# Altium PCB pll_layout.PcbDoc
Units mm, origin at the board's own origin, x right, y up, seen from the top; angles counter-clockwise.
Board outline 90.18 x 57.51 mm, 4 copper layers (Top Layer, GND_L2, PWR_L3, Bottom Layer), stack 1.571 mm thick; 57 components, 26 nets, 160 pads, 293 vias.
Unrouted connection lines stored in the file: 1.
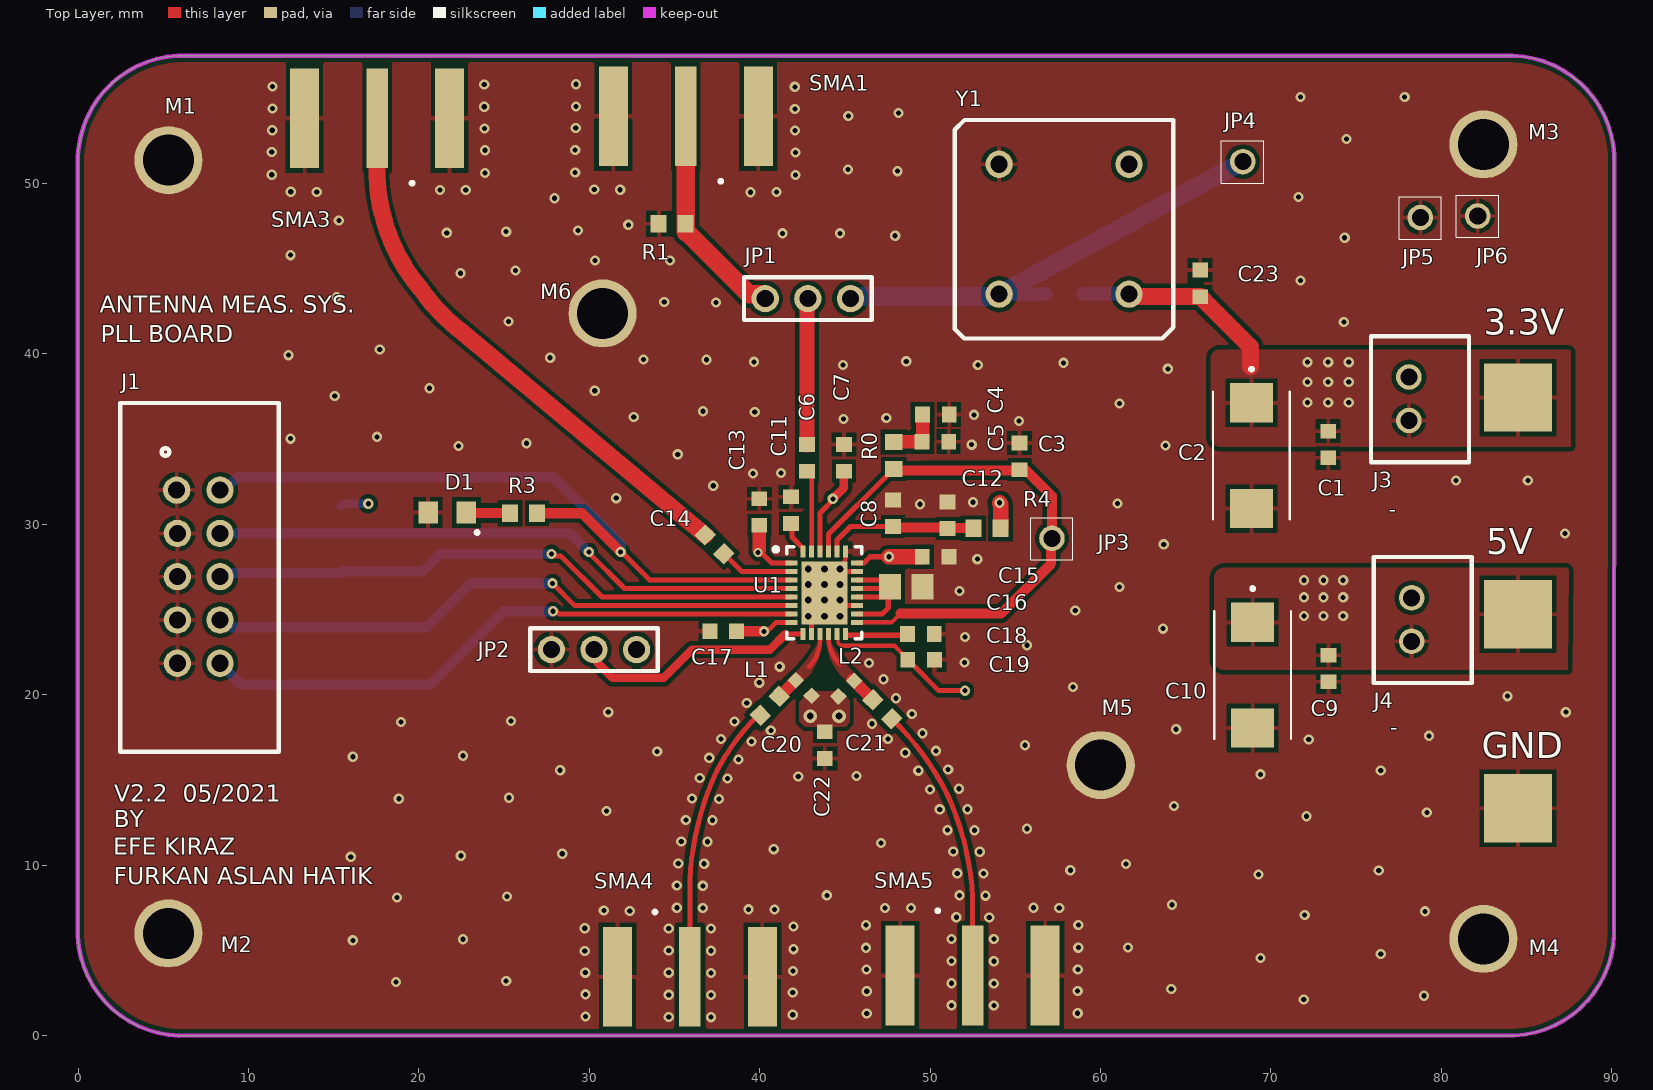
[diagram p0: Top Layer view]
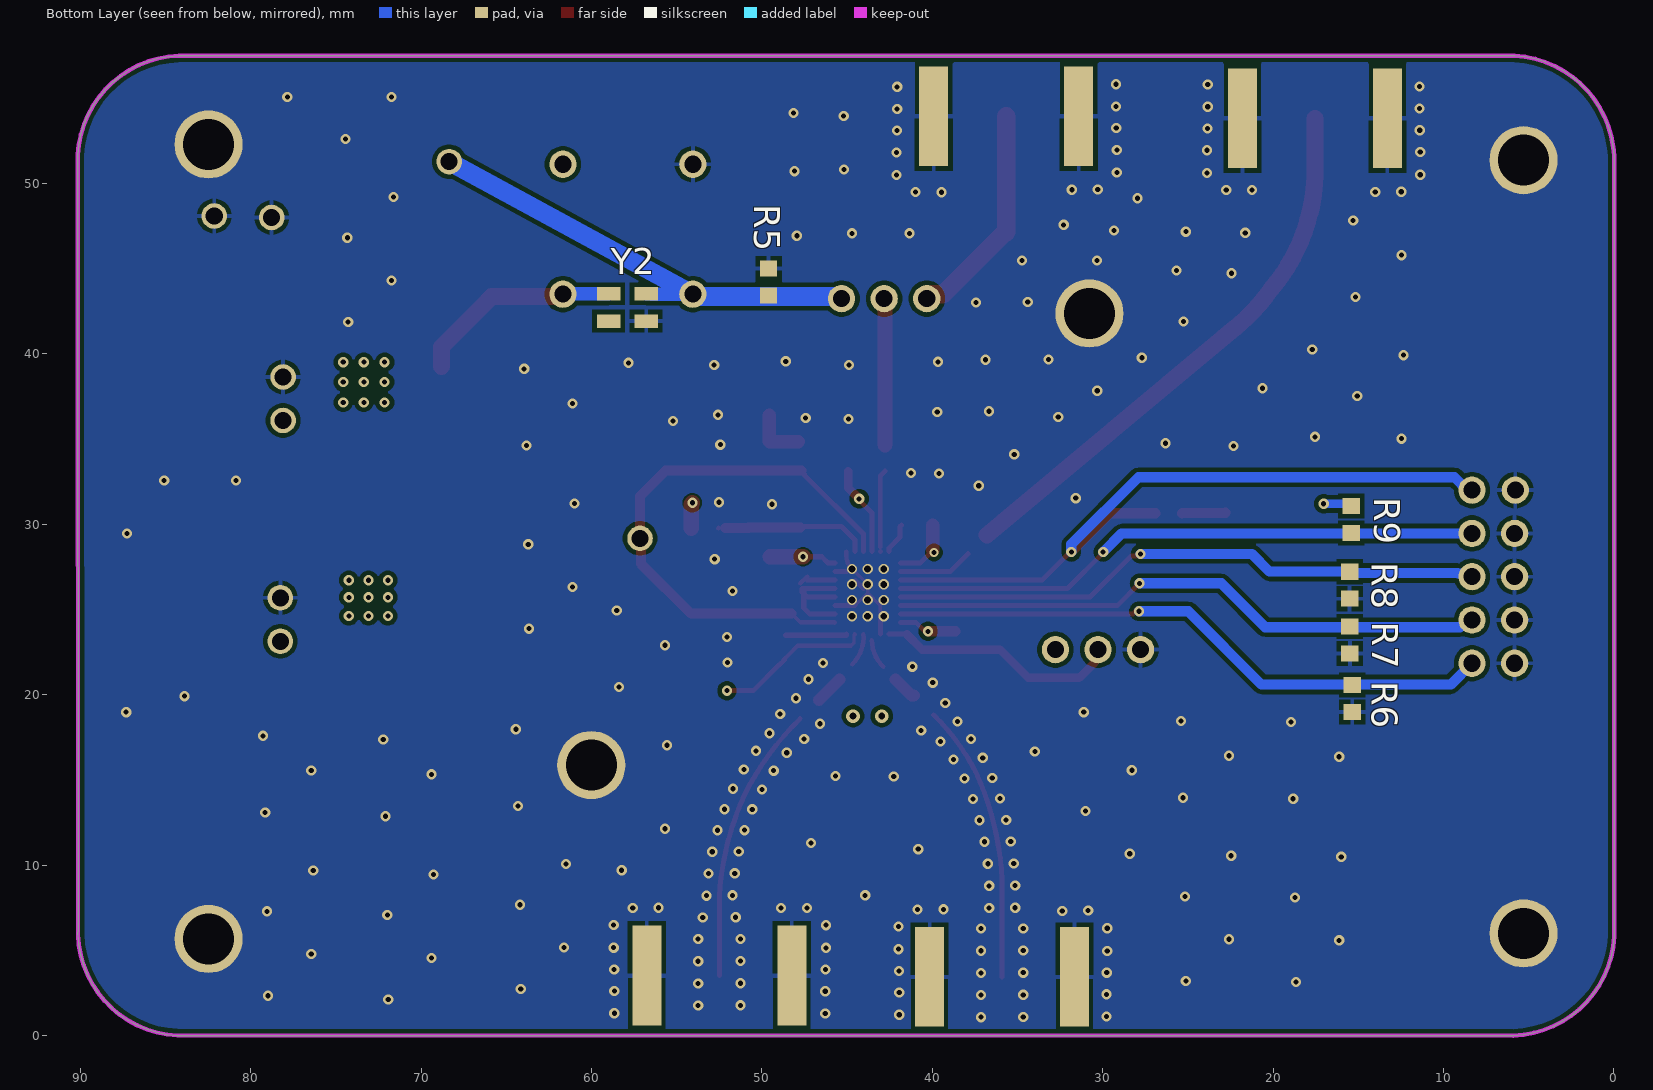
[diagram p1: Bottom Layer view, seen from below]
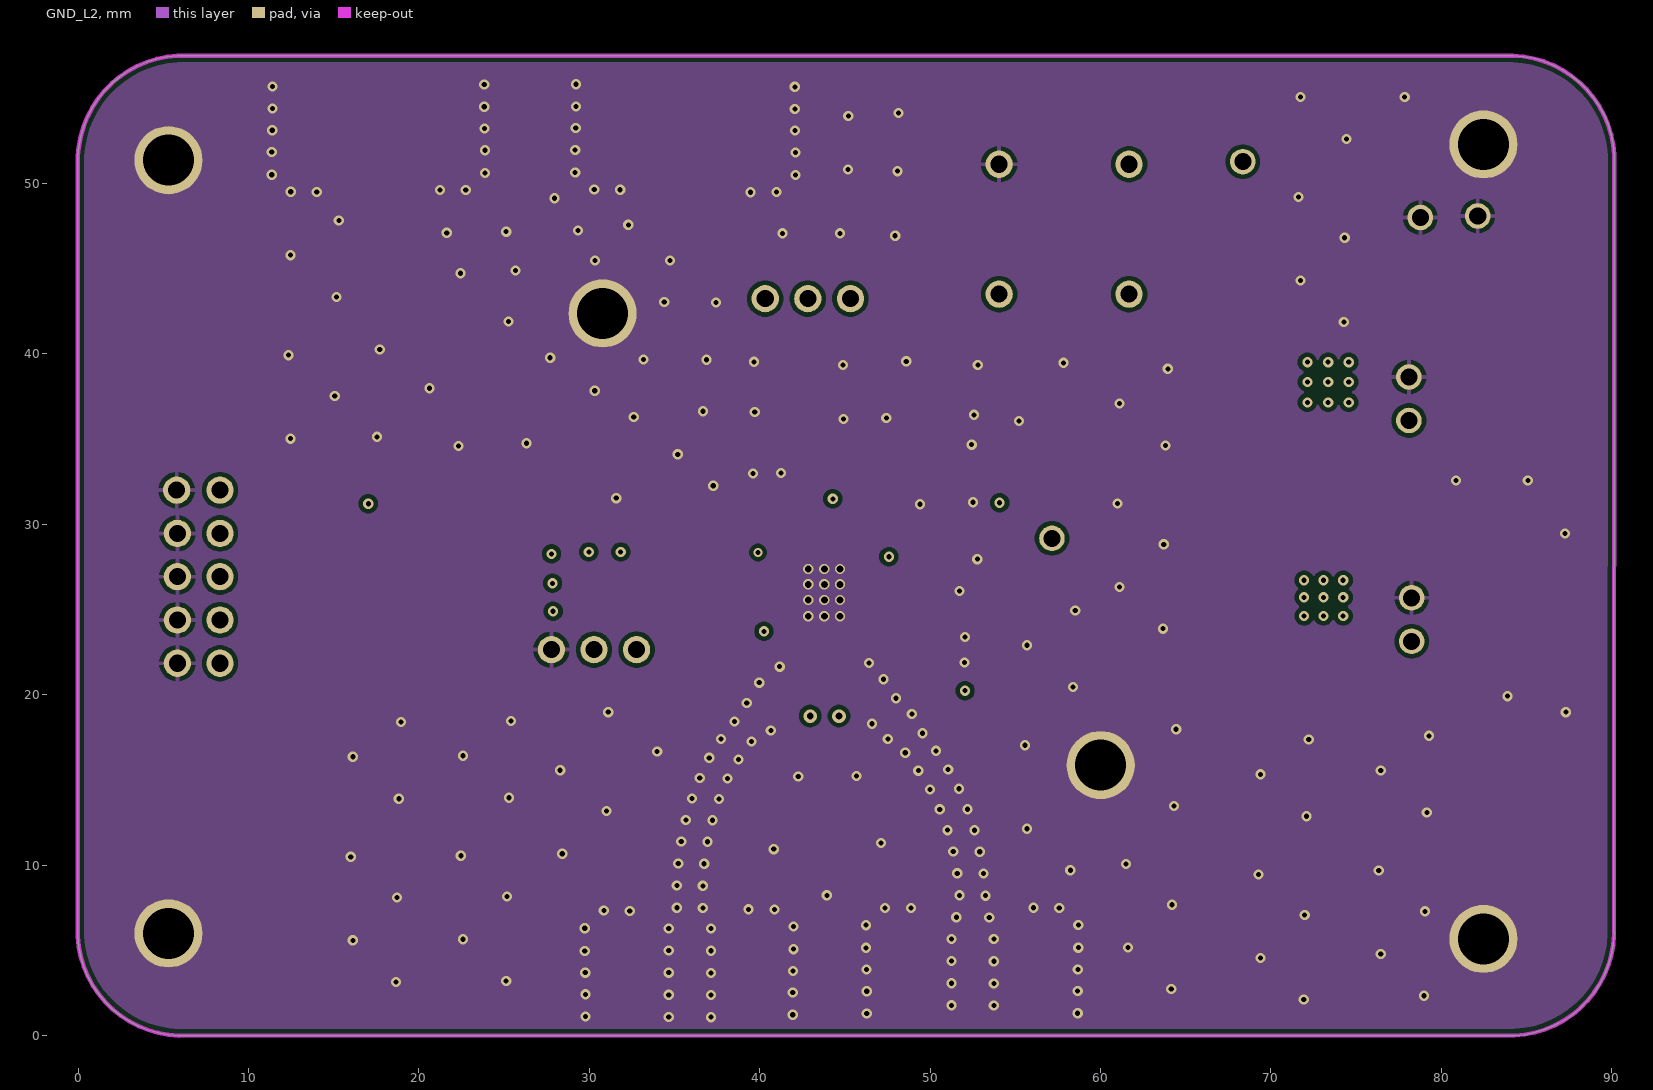
[diagram p2: GND_L2]
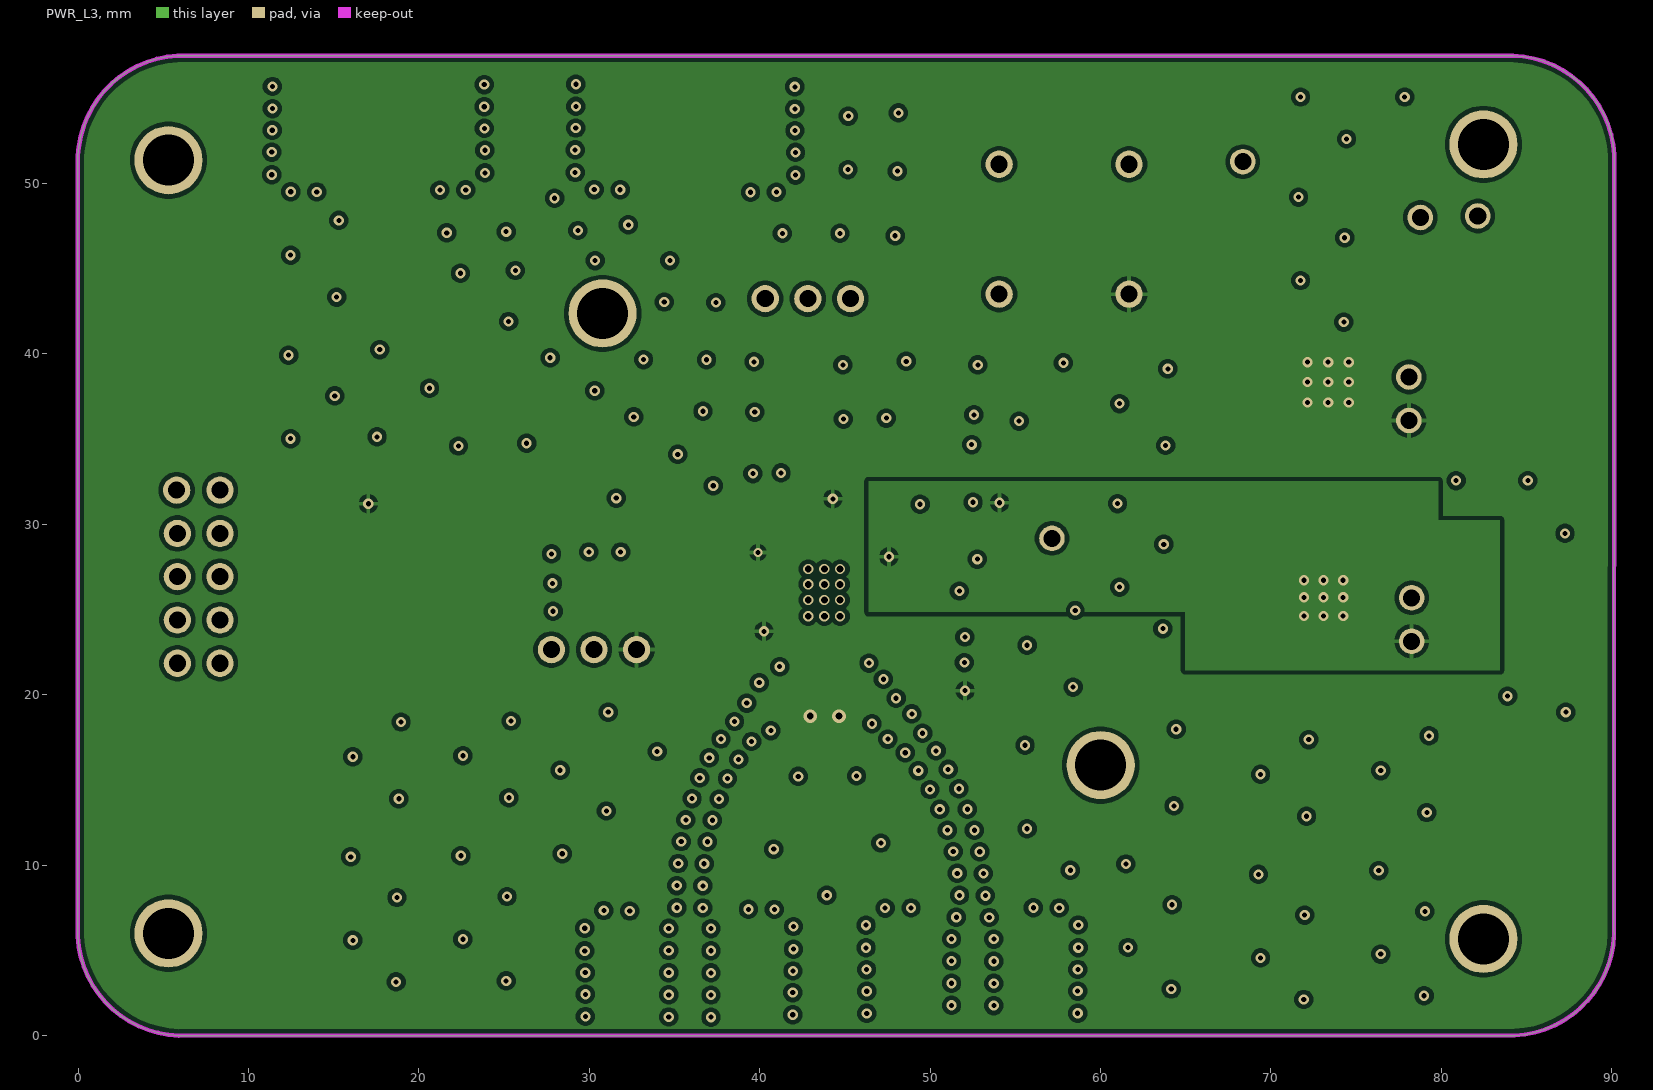
[diagram p3: PWR_L3]
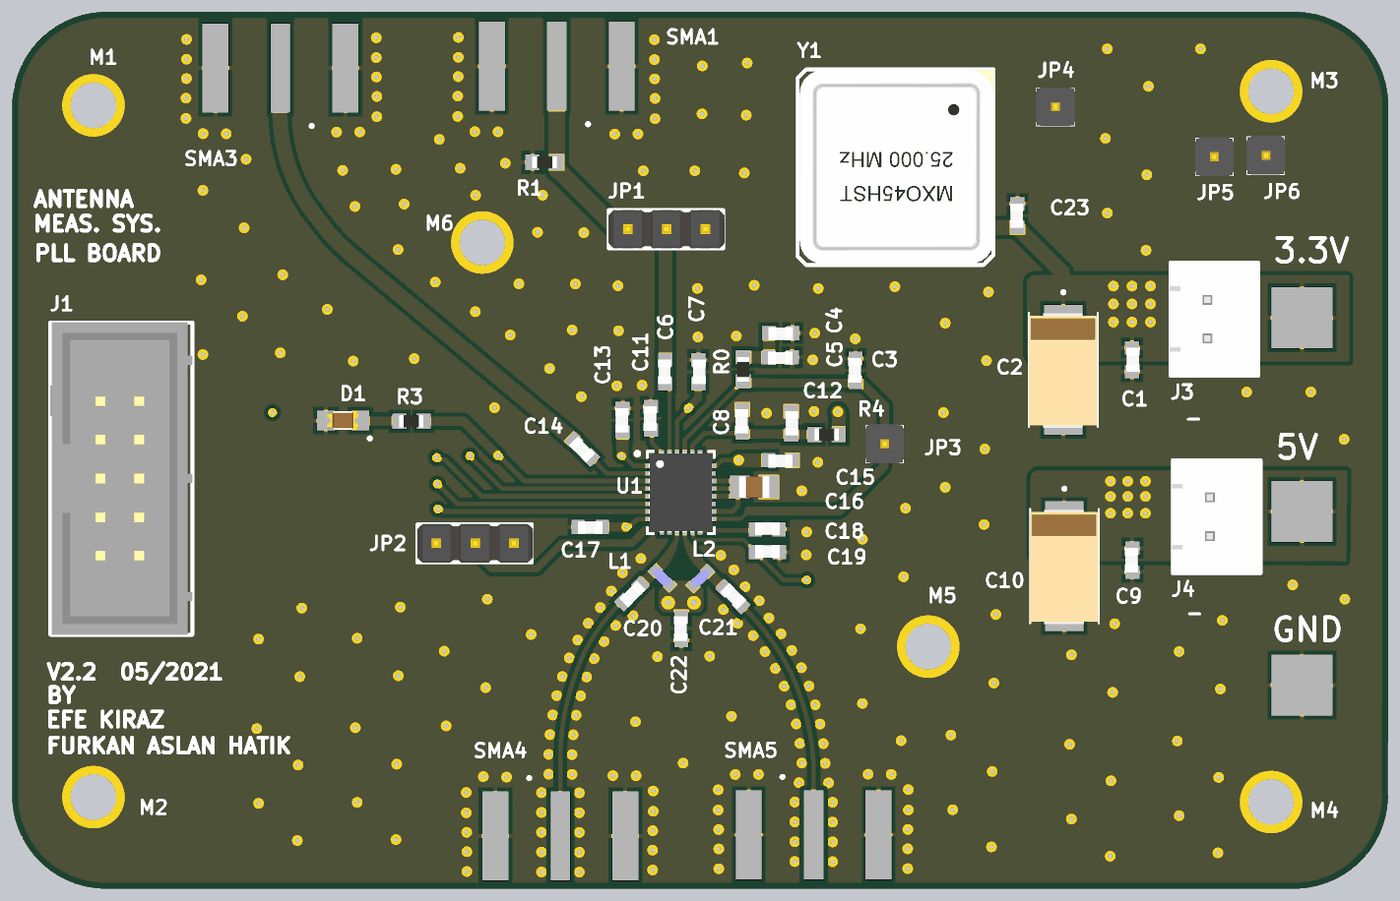
[diagram p4: 3D render of the assembled board from above, using the file's embedded part models]
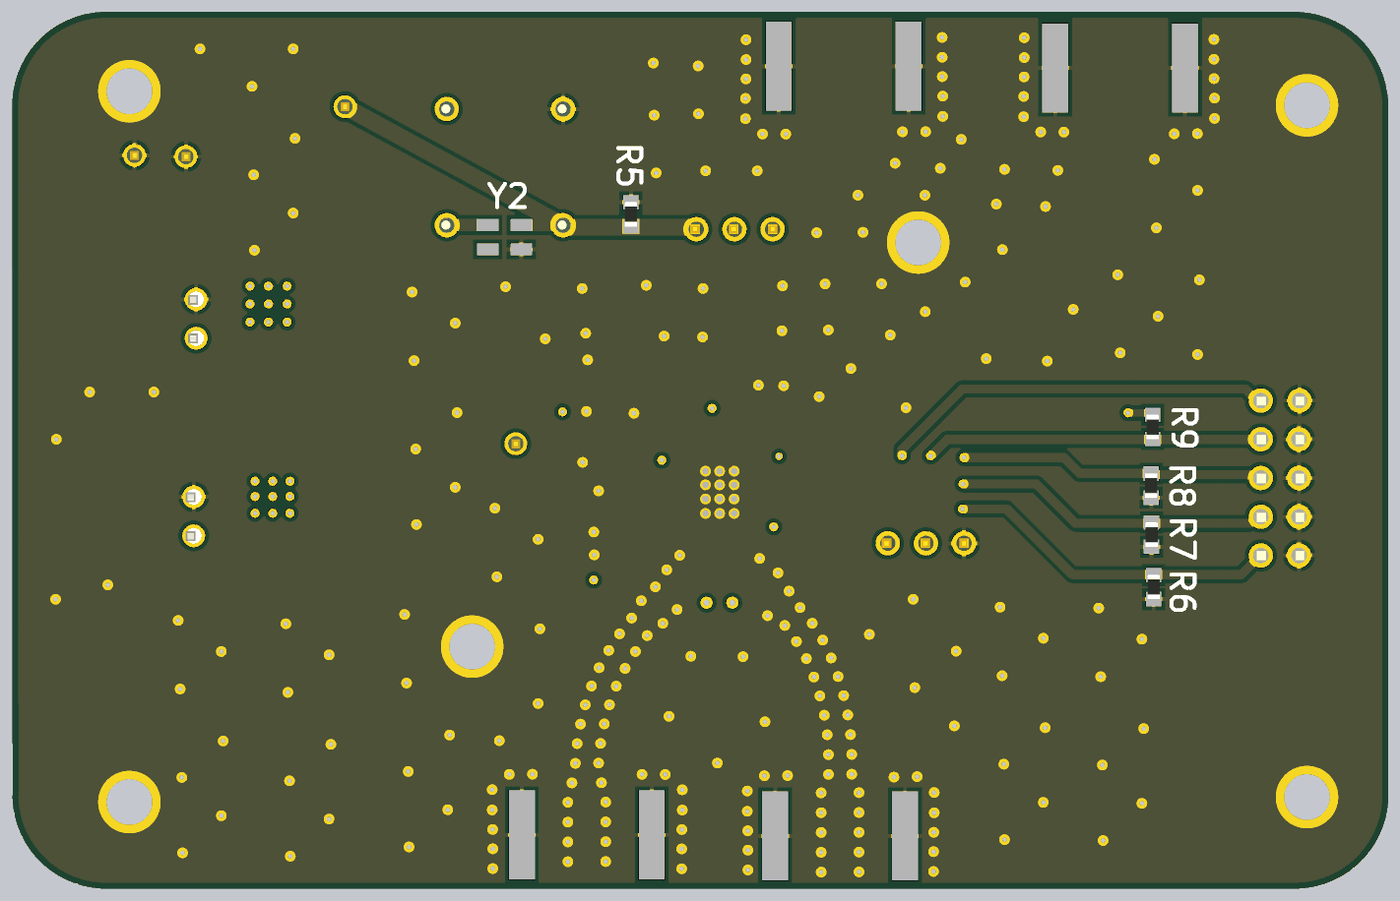
[diagram p5: 3D render of the assembled board from below, using the file's embedded part models]

## Layer stack, top to bottom
Top Solder: solder mask 0.0102, Solder Resist, Dk 3.5
Top Layer: signal copper 0.0356
Dielectric 2: prepreg 0.2, PP-021, Dk 4.7
GND_L2: signal copper 0.0175
Dielectric 1: dielectric 1.065, FR-4, Dk 4.8
PWR_L3: signal copper 0.0175
Dielectric 3: prepreg 0.2, PP-021, Dk 4.7
Bottom Layer: signal copper 0.0356
Bottom Solder: solder mask 0.0102, Solder Resist, Dk 3.5

## Board outline
1.201,2.439 0.86,2.943 0.57,3.477 0.334,4.038 0.155,4.619 0.035,5.215 -0.026,5.821 -0.026,51.586 0.005,51.957 0.156,52.777 0.324,53.361 0.55,53.926 0.831,54.465 1.163,54.975 1.545,55.449 1.971,55.882 2.438,56.272 2.941,56.613 3.476,56.903 4.037,57.139 4.618,57.318 5.214,57.438 5.819,57.499 6.123,57.5 83.917,57.501 84.221,57.506 84.828,57.455 85.426,57.345 86.01,57.176 86.575,56.95 87.115,56.669 87.624,56.337 88.098,55.955 88.532,55.529 88.921,55.061 89.263,54.558 89.552,54.023 89.788,53.462 89.967,52.88 90.087,52.284 90.148,51.679 90.149,51.375 90.153,48.8 90.131,6.231 90.136,5.927 90.085,5.321 89.975,4.723 89.806,4.139 89.581,3.574 89.3,3.034 88.968,2.525 88.586,2.051 88.16,1.617 87.693,1.228 87.189,0.886 86.655,0.597 86.094,0.361 85.513,0.182 84.917,0.061 84.311,0 84.007,0 7.248,0 6.205,0.001 5.901,-0.004 5.295,0.047 4.696,0.157 4.112,0.326 3.547,0.551 3.008,0.832 2.498,1.165 2.025,1.546 1.591,1.972

## Design rules (kind name [scope] priority, off if disabled: settings)
Clearance NETC20_2 [InNamedPolygon('NETC20_2_L01_P002')] p1: gap=0.293 ignorepadtopadclearanceinfootprint=FALSE except(0: SMDPad-Hole THPad-Hole Via-Hole Fill-Hole Poly-Hole Region-Hole Text-Hole; 0.1: SMDPad-Fill SMDPad-Poly SMDPad-Region THPad-Fill THPad-Poly THPad-Region Via-Fill Via-Poly Via-Region Fill-Fill Fill-Poly Fill-Region Poly-Poly Poly-Region Region-Region; 0.254: SMDPad-SMDPad SMDPad-THPad SMDPad-Via SMDPad-Text THPad-THPad THPad-Via THPad-Text Via-Text Fill-Text Poly-Text Region-Text Text-Text; 0.3: Via-Via)
Clearance NETC20_1 [InNet('NetC20_1') vs InNet('NetC20_1')] p2: gap=0.293 ignorepadtopadclearanceinfootprint=FALSE except(0: Arc-Hole Track-Hole SMDPad-Hole THPad-Hole Via-Hole Fill-Hole Poly-Hole Region-Hole Text-Hole; 0.1: SMDPad-Fill SMDPad-Poly SMDPad-Region THPad-Fill THPad-Poly THPad-Region Via-Fill Via-Poly Via-Region Fill-Fill Fill-Poly Fill-Region Poly-Poly Poly-Region Region-Region; 0.254: SMDPad-SMDPad SMDPad-THPad SMDPad-Via SMDPad-Text THPad-THPad THPad-Via THPad-Text Via-Text Fill-Text Poly-Text Region-Text Text-Text; 0.3: Via-Via)
Clearance Clearance_6 [InNamedPolygon('NETC21_2_L01_P002')] p3: gap=0.254 ignorepadtopadclearanceinfootprint=FALSE except(0: Arc-Hole Track-Hole SMDPad-Hole THPad-Hole Via-Hole Fill-Hole Poly-Hole Region-Hole Text-Hole; 0.1: Arc-Fill Arc-Poly Arc-Region Track-Fill Track-Poly Track-Region SMDPad-Fill SMDPad-Poly SMDPad-Region THPad-Fill THPad-Poly THPad-Region Via-Fill Via-Poly Via-Region Fill-Fill Fill-Poly Fill-Region Poly-Poly Poly-Region Region-Region; 0.3: Via-Via)
Clearance NETC21_1 [InNet('NetC21_1') vs InNet('NetC21_1')] p4: gap=0.293 ignorepadtopadclearanceinfootprint=FALSE except(0: SMDPad-Hole THPad-Hole Via-Hole Fill-Hole Poly-Hole Region-Hole Text-Hole; 0.1: SMDPad-Fill SMDPad-Poly SMDPad-Region THPad-Fill THPad-Poly THPad-Region Via-Fill Via-Poly Via-Region Fill-Fill Fill-Poly Fill-Region Poly-Poly Poly-Region Region-Region; 0.254: SMDPad-SMDPad SMDPad-THPad SMDPad-Via SMDPad-Text THPad-THPad THPad-Via THPad-Text Via-Text Fill-Text Poly-Text Region-Text Text-Text; 0.3: Via-Via)
Clearance STD_Clearance [All] p5: gap=0.254 ignorepadtopadclearanceinfootprint=FALSE except(0.15: Arc-Text Track-Text SMDPad-Text THPad-Text Via-Text Fill-Text Poly-Text Region-Text Text-Text; 0.2: Arc-Arc Arc-Track Arc-SMDPad Arc-THPad Track-Track Track-SMDPad Track-THPad SMDPad-SMDPad SMDPad-THPad SMDPad-Via SMDPad-Hole THPad-THPad THPad-Via THPad-Hole Via-Hole Fill-Hole Poly-Hole Region-Hole Text-Hole; 0.3: Arc-Hole Track-Hole Via-Via)
HoleSize [All] p1: absolutevalues=TRUE maxlimit=6 minlimit=0.2 maxpercent=80.000 minpercent=20.000
HoleToHoleClearance [All] p1: gap=0.5 allowstackedmicrovias=TRUE
MinimumSolderMaskSliver [All] p1 off: minsoldermaskwidth=0.254
PlaneClearance [All] p1: clearance=0.6
PolygonConnect [All] p1: connectstyle=Relief reliefconductorwidth=0.254 reliefentries=4 polygonreliefangle="90 Angle" airgapwidth=0.254
RoomDefinition pll_schematic [InComponentClass('pll_schematic')] p1: confinementstyle=ConfineIn formatcopy=TRUE lockcomponents=FALSE outline -0.392,-2.59 91.288,-2.59 91.288,58.68 -0.392,58.68
RoutingVias [All] p1: holewidth=0.6 width=0.6 viastyle="Through Hole" minholewidth=0.2 minwidth=0.4 maxholewidth=1 maxwidth=1.6
SolderMaskExpansion [All] p1: expansion=0.05 istentingtop=FALSE
Width [All] p1: maxlimit=2 minlimit=0.2 preferedwidth=0.254 midlayer1_minwidth=0.254 midlayer1_maxwidth=0.254 midlayer2_minwidth=0.254 midlayer2_maxwidth=0.254 minimp=50.000000 maximp=50.000000 favimp=50.000000
26 further rules are at their usual default settings.

## Components (designator, comment, footprint, x,y, rotation, side; value= is the part's Value field where it differs from the comment)
C1 "1uF" C0603 73.365,34.69 r90 top
C2 "330uF" C_TANT_D 68.86,34.03 r270 top
C3 "2.7nF" C0603 55.24,33.99 r270 top
C4 "22nF" C0603 50.34,36.44 r0 top
C5 "6.8nF" C0603 50.31,34.85 r0 top
C6 "1uF" C0603 42.773,33.9 r270 top
C7 "10nF" C0603 44.94,33.9 r90 top
C8 "1uF" C0603 47.82,30.65 r270 top
C9 "1uF" C0603 73.38,21.54 r270 top
C10 "330uF" C_TANT_D 68.93,21.15 r270 top
C11 "1uF" C0603 41.83,30.84 r270 top
C12 "10nF" C0603 51.02,30.53 r90 top
C13 "100nF" C0603 39.973,30.725 r270 top
C14 "22nF" C0603 37.347,28.826 r315 top
C15 "10nF" C0603 50.32,28.1 r0 top
C16 "2.2uF" C0805 48.6,26.34 r0 top
C17 "100nF" C0603 37.853,23.725 r0 top
C18 "1uF" C0603 49.46,23.56 r180 top
C19 "10nF" C0603 49.47,22.06 r180 top
C20 "100pF" C0603 40.59,19.35 r45 top
C21 "100pF" C0603 47.198,19.15 r135 top
C22 "100nF" C0603 43.82,17.05 r270 top
C23 "100nF" C0603 65.85,44.14 r270 top
D1 "-" D0805 21.66,30.7 r180 top
J1 "-" IDC-2X05 8.323,21.85 r180 top
J3 "-" JST_XH_A_2 78.1,37.725 r180 top
J4 "-" JST_XH_A_2 78.26,24.765 r180 top
JP1 "-" PIN_HEADER_1X03 42.823,43.25 r270 top
JP2 "-" PIN_HEADER_1X03 30.273,22.65 r270 top
JP3 "-" PIN_HEADER_1X01 57.15,29.18 r0 top
JP4 "-" PIN_HEADER_1X01 68.35,51.29 r0 top
JP5 "-" PIN_HEADER_1X01 78.77,48.01 r0 top
JP6 "-" PIN_HEADER_1X01 82.14,48.1 r0 top
L1 "68nH" L0402 42.58,20.4 r135 top
L2 "68nH" L0402 45.08,20.36 r225 top
M1 "MOUNTING_HOLE" MOUNTING_HOLE_NP_M3 5.298,51.375 r0 top
M2 "MOUNTING_HOLE" MOUNTING_HOLE_NP_M3 5.298,6 r0 top
M3 "MOUNTING_HOLE" MOUNTING_HOLE_NP_M3 82.473,52.3 r0 top
M4 "MOUNTING_HOLE" MOUNTING_HOLE_NP_M3 82.473,5.675 r0 top
M5 "MOUNTING_HOLE" MOUNTING_HOLE_NP_M3 60.01,15.87 r0 top
M6 "MOUNTING_HOLE" MOUNTING_HOLE_NP_M3 30.78,42.38 r0 top
R0 "453R" R0603 47.873,34.05 r270 top
R1 "51.1R" R0603 34.86,47.64 r0 top
R3 "330R" R0603 26.13,30.65 r0 top
R4 "15R" R0603 53.35,29.78 r0 top
R5 "51.1R" R0603 49.61,44.23 r270 bottom
R6 "200K" R0603 15.35,19.78 r90 bottom
R7 "200K" R0603 15.49,23.21 r90 bottom
R8 "200K" R0603 15.51,26.43 r90 bottom
R9 "200K" R0603 15.42,30.28 r90 bottom
SMA1 "-" SMA 35.66,53.943 r180 top
SMA3 "-" SMA 17.548,53.825 r180 top
SMA4 "-" SMA 35.898,3.45 r0 top
SMA5 "-" SMA 52.498,3.525 r0 top
U1 "LTC6946" QFN50P400X500X80_HS-29N_2 43.793,25.981 r0 top
Y1 "-" XOSC 57.85,47.31 r180 top
Y2 "OPT" XOSC_SMD 58.99,41.93 r0 bottom

## Footprints (in the part's own frame and the unit in brackets; to place one, negate y for a bottom-side part, rotate by r counter-clockwise, add the part's x,y. Pads: shape width x height; smd on the part's side, far side on the other; paste and mask are expansions set on the pad)
C0603 [mm]
  rect 0.87x0.93 smd: 1(-0.78,0) 2(0.78,0)
  body extent -0.8,-0.48 0.8,0.38, height 0.83
C0805 [mm]
  rect 1.3x1.5 smd: 1(-0.95,0) 2(0.95,0)
  body extent -1,-0.72 1,0.73, height 1.22
C_TANT_D [mm]
  rect 2.31x2.52 smd: 1(-3.1,0) 2(3.1,0)
  silkscreen extent -5.18,-2.25 3.75,2.25, body extent -3.7,-2.27 3.8,2.22, height 3.15
D0805 [mm]
  rect 1.15x1.3 smd: A(-1.125,0) C(1.125,0)
  silkscreen extent -1.85,1.08 -1.65,1.27, body extent -0.97,-0.62 1.03,0.63, height 1.1
IDC-2X05 [mm]
  round 1.6 hole 1: 1(2.54,-10.16) 2(0,-10.16) 3(2.5,-7.62) 4(0,-7.62) 5(2.5,-5.08) 6(0,-5.08) 7(2.5,-2.54) 8(0,-2.54) 9(2.5,0) 10(0,0)
  silkscreen extent -3.45,-15.28 5.85,5.2, body extent -3.45,-15.3 5.85,5.2, height 9.1
JST_XH_A_2 [mm]
  round 1.5 hole 1: 1(0,1.625) 2(0,-0.925)
  silkscreen extent -3.53,-3.32 2.22,4.08, body extent -3.55,-3.23 2.29,3.98, height 7.21
L0402 [mm]
  rect 0.7x0.7 smd: 1(-0.65,0) 2(0.65,0)
  body extent -0.59,-0.3 0.59,0.34, height 0.65
MOUNTING_HOLE_NP_M3 [mm]
  round 4 hole 3: 1(0,0)
PIN_HEADER_1X01 [mm]
  round 1.5 hole 1: 1(0,0)
  silkscreen extent -1.25,-1.26 1.22,1.21, body extent -1.28,-1.28 1.26,1.26, height 5.94
PIN_HEADER_1X03 [mm]
  round 1.6 hole 1: 1(0,2.5) 2(0,0) 3(0,-2.5)
  silkscreen extent -1.25,-3.75 1.25,3.75, body extent -1.27,-3.77 1.27,3.85, height 9.5
QFN50P400X500X80_HS-29N_2 [mm] "QFN, 28-Leads, Body 4.00x5.00mm, Pitch 0.50mm, Thermal Pad 2.70x3.70mm, IPC Medium Density"
  rect 0.7x0.3 smd: 1(-1.925,1.75) 2(-1.925,1.25) 3(-1.925,0.75) 4(-1.925,0.25) 5(-1.925,-0.25) 6(-1.925,-0.75) 7(-1.925,-1.25) 8(-1.925,-1.75) 15(1.925,-1.75) 16(1.925,-1.25) 17(1.925,-0.75) 18(1.925,-0.25) 19(1.925,0.25) 20(1.925,0.75) 21(1.925,1.25) 22(1.925,1.75)
  rect 0.3x0.7 smd: 9(-1.25,-2.425) 10(-0.75,-2.425) 11(-0.25,-2.425) 12(0.25,-2.425) 13(0.75,-2.425) 14(1.25,-2.425) 23(1.25,2.425) 24(0.75,2.425) 25(0.25,2.425) 26(-0.25,2.425) 27(-0.75,2.425) 28(-1.25,2.425)
  rect 2.7x3.7 smd: 29(0,0)
  silkscreen extent -2.97,-2.7 2.2,2.7, body extent -2.1,-2.6 2.1,2.6, height 0.8
R0603 [mm]
  rect 0.94x1.02 smd: 1(-0.79,0) 2(0.79,0)
  body extent -0.8,-0.4 0.8,0.4, height 0.45
SMA [mil]
  rect 50x230 smd: 1(0,0)
  rect 67x230 smd: 2(-167.5,0) 2(167.5,0)
  rect 67x230 smd far side: 2(-167.5,0) 2(167.5,0)
  silkscreen extent -85,146 -77,154, body extent -188,-496 188,64, height 176
XOSC [mm]
  round 1.6 hole 1: 1(-3.825,-3.825) 4(3.8,-3.825) 5(3.8,3.8) 8(-3.825,3.8)
  silkscreen extent -6.43,-6.43 6.4,6.4, body extent -6.42,-6.37 6.28,6.33, height 4.6
XOSC_SMD [mm]
  rect 1.4x0.8 smd: 1(0,0) 2(-2.2,0) 3(-2.2,-1.6) 4(0,-1.6)

## Part data
C1 C3 C4 C5 C6 C7 C8 C9 C11 C12 C13 C14 C15 C16 C17 C18 C19 C20 C21 C22 C23: library part C
C2 C10: library part CP
D1: library part LED, ASSEMBLY=OPT
J1: library part Conn_Gene_1x10
J3 J4: library part Conn_Gene_1x02
JP1 JP2: library part "Pin Header 1x03"
JP3 JP4 JP5 JP6: library part "Pin Header 1x01"
L1 L2: library part L
M1 M2 M3 M4 M5 M6: "Non-Plated"
R0 R1 R3 R4 R5: library part R
  R3: ASSEMBLY=OPT
R6 R7 R8 R9: library part R, "OPT", ASSEMBLY=OPT
SMA1 SMA3 SMA4 SMA5: library part SMA
U1: library part LTC6946IUFD-1#PBF-ND, ComponentLink1Description=LTC6946, ComponentLink1URL=https://www.digikey.com/en/products/detail/analog-devices-inc/LTC6946IUFD-1-PBF/2756832
Y1: library part OSC
Y2: library part OSC_SMD

## Free pads (board coordinates)
  rect 4x4 smd: 6(84.5,24.73) 7(84.5,13.34) 8(84.5,37.44)

## Via types
v1: diameter 0.6, hole 0.3, Top Layer to Bottom Layer, 278 vias
v2: diameter 0.6, hole 0.4, Top Layer to Bottom Layer, 12 vias
v3: diameter 0.8, hole 0.4, Top Layer to Bottom Layer, 2 vias
v4: diameter 0.5, hole 0.3, Top Layer to Bottom Layer, 1 vias

## Nets (pads, with @x,y where several pads share a name; then routed paths per layer and width w, separated by ;. In a path a pad name is that pad's centre, name@x,y a point inside that pad or via, vN(x,y) a via of type N, cw(c..) or ccw(c..) an arc to the next point about the centre after c; other vN are vias at no path point)
3.3V: C1.2 C2.1 C7.1 C13.2 C17.2 C19.2 C22.1 C23.2 J3.1 JP2.1 L1.1 L2.2 pad.8 R9.2 U1.1 U1.8 U1.13 U1.26 Y1.8 Y2.4 | length 35.3
  Top Layer w0.2: U1.13@44.566,23.533 44.593,23.506 44.593,23.057 44.77,22.88
  Top Layer w0.25: 44.77,22.88 47.9,22.88 48.38,22.4 48.69,22.09 C19.2
  Top Layer w0.254: U1.13 U1.13@44.566,23.533
  Top Layer w0.3: v4@40.088,28.35 40.365,28.073 40.706,27.731 U1.1 ; v1(40.248,23.725) 40.438,23.725 40.944,24.231 U1.8 ; U1.26 43.543,30.669 v1@44.373,31.5 ; C19.2 48.69,22.03 48.975,21.745 49.005,21.745 50.51,20.24 v1(52.05,20.24)
  Top Layer w0.5: v1(44.29,31.5) 44.94,32.15 C7.1
  Top Layer w0.6: C17.2 v1(40.248,23.725)
  Top Layer w0.8: v4@39.973,28.479 C13.2
  Top Layer w1: Y1.8@61.705,43.37 61.71,43.365 65.875,43.365 66.065,43.175 66.065,43.145 68.8,40.41 68.8,39.28
  Bottom Layer w0.5: R9.2 15.55,31.2 17.02,31.2 v1(17.03,31.21)
  Bottom Layer w0.8: Y2.4 61.655,43.53 Y1.8
  other v1: 72.14,37.16 73.36,37.16 74.57,37.16 72.14,38.35 73.36,38.35 74.57,38.35 72.14,39.52 73.36,39.52 74.57,39.52
  other v3: 42.96,18.75 44.65,18.75
  other v4: 39.898,28.35
5V: C9.1 C10.1 C15.1 J4.1 pad.6 R4.2 U1.22 | length 5.5
  Top Layer w0.3: U1.22 46.116,27.731 46.485,28.099 v1(47.58,28.099)
  Top Layer w0.9: v1(47.58,28.099) C15.1@49.525,28.1 ; v1(54.08,31.273) 54.08,31.246 54.14,31.186 R4.2
  other v1: 71.95,24.62 73.08,24.62 74.24,24.62 71.95,25.72 73.08,25.72 74.24,25.72 71.95,26.72 73.08,26.72 74.24,26.72
CP: C3.2 JP3.1 R0.2 U1.15 U1.25 | length 33.4
  Top Layer w0.254: U1.15 45.737,24.25 47.737,24.25 48.254,24.767
  Top Layer w0.3: U1.25 44.043,29.429 47.513,32.9 47.513,32.94 47.833,33.26 R0.2
  Top Layer w0.6: R0.2@47.678,33.165 49.493,33.165 49.498,33.16 50.521,33.16 51.771,33.16 54.66,33.16 55.65,33.16 57.15,31.66 JP3.1 57.1,29.13 57.1,27.7 54.167,24.767 48.254,24.767
CS': J1.4 R9.1 U1.4 | length 34.9
  Top Layer w0.3: v1(29.97,28.38) 29.97,28.33 32.069,26.231 U1.4
  Bottom Layer w0.6: J1.4 28.88,29.47 v1(29.97,28.38)
GND: C1.1 C2.2 C3.1 C4.2 C5.2 C7.2 C8.1 C9.2 C10.2 C11.1 C12.2 C13.1 C15.2 C16.2 C17.1 C18.1 C19.1 C22.2 C23.1 D1.C J1.1 J1.3 J1.5 J1.7 J1.9 J3.2 J4.2 JP2.3 JP5.1 JP6.1 M1.1 M2.1 M3.1 M4.1 M5.1 M6.1 pad.7 R1.1 R5.1 R6.1 R7.1 R8.1 SMA1.2 SMA3.2 SMA4.2 SMA5.2 U1.10 U1.17 U1.21 U1.23 U1.29 Y1.4 Y2.2 | length 9.2
  Top Layer w0.2: U1.29@43.043,24.606 43.043,25.231 U1.29 ; U1.29@44.543,25.231 U1.29 ; v2(44.718,27.381) 44.693,27.381 v2(43.793,26.481) U1.29
  Top Layer w0.254: v2(44.718,27.381) ccw(c43.933,28.166) 44.845,27.533 ccw(c43.933,28.166) 45.043,28.166 U1.23
  Top Layer w0.3: U1.10 U1.29@43.043,24.606 ; U1.29@44.043,26.231 U1.29@44.505,26.694 ; U1.29@44.543,25.231 U1.17 ; U1.29@45.018,27.231 U1.21
  other v1: 37.138,1.079 34.658,1.091 29.77,1.12 41.94,1.22 46.28,1.3 58.66,1.31 51.258,1.773 53.738,1.76 71.93,2.12 78.99,2.34 37.138,2.379 34.658,2.391 29.77,2.42 41.94,2.52 46.28,2.6 58.66,2.61 64.15,2.73 53.738,3.06 51.258,3.073 18.66,3.15 25.12,3.21 37.138,3.679 29.76,3.69 34.658,3.691 41.95,3.79 46.27,3.87 58.67,3.88 53.738,4.36 51.258,4.373 69.39,4.56 76.45,4.78 29.73,4.97 34.658,4.991 37.138,4.979 41.98,5.07 46.24,5.15 58.7,5.16 61.61,5.17 16.12,5.59 22.58,5.65 53.738,5.66 51.258,5.673 34.658,6.291 37.138,6.279 29.73,6.3 41.98,6.4 46.24,6.48 58.7,6.49 51.539,6.943 53.473,6.932 71.98,7.07 32.37,7.31 79.04,7.29 30.85,7.34 39.34,7.41 40.86,7.4 36.662,7.488 47.36,7.48 35.135,7.501 48.88,7.49 56.06,7.5 57.58,7.49 64.2,7.68 18.71,8.1 25.17,8.16 53.245,8.212 43.94,8.23 51.726,8.229 35.135,8.801 36.662,8.788 69.27,9.46 53.126,9.507 51.594,9.523 76.33,9.68 58.23,9.7 61.49,10.07 35.216,10.098 36.74,10.086 16,10.49 22.46,10.55 28.41,10.67 52.91,10.788 51.356,10.801 40.82,10.94 47.11,11.3 36.932,11.372 35.394,11.386 51.013,12.055 52.598,12.051 55.69,12.14 37.224,12.638 35.665,12.658 72.09,12.87 79.15,13.09 31,13.18 50.569,13.276 52.189,13.285 64.31,13.48 37.617,13.878 18.82,13.9 36.028,13.906 25.28,13.96 49.991,14.441 51.691,14.485 38.107,15.082 36.482,15.124 42.26,15.21 45.68,15.24 69.39,15.33 49.309,15.548 76.45,15.55 28.29,15.57 51.059,15.621 38.76,16.206 37.038,16.299 16.12,16.36 22.58,16.42 48.539,16.595 33.98,16.67 50.349,16.71 55.57,17.04 39.522,17.259 72.22,17.37 37.725,17.403 47.517,17.399 79.28,17.59 49.56,17.744 40.653,17.9 64.44,17.98 46.583,18.303 18.95,18.4 38.52,18.431 25.41,18.46 48.927,18.879 31.11,18.98 87.31,18.98 39.24,19.514 48.003,19.793 83.89,19.92 58.39,20.45 39.97,20.71 47.26,20.91 41.17,21.65 46.41,21.86 52.01,21.89 55.69,22.91 52.04,23.39 63.66,23.88 58.52,24.95 51.72,26.09 61.12,26.32 52.77,27.96 63.71,28.83 87.26,29.47 49.41,31.18 61,31.22 52.52,31.3 31.58,31.54 37.27,32.27 80.87,32.57 85.08,32.57 39.6,32.98 41.25,33.02 35.19,34.11 22.32,34.6 63.82,34.63 52.44,34.68 26.32,34.76 12.47,35.03 17.54,35.14 55.22,36.06 44.91,36.18 47.43,36.24 32.61,36.31 52.57,36.43 39.71,36.59 36.67,36.64 61.12,37.09 15.06,37.54 30.32,37.84 20.62,37.99 63.95,39.13 44.88,39.36 52.8,39.36 57.82,39.48 39.67,39.54 48.6,39.57 33.18,39.67 36.88,39.66 27.7,39.78 12.35,39.93 17.7,40.26 74.28,41.87 25.26,41.91 37.43,43.02 34.4,43.05 15.17,43.34 71.74,44.31 22.436,44.74 25.66,44.9 30.34,45.48 34.73,45.48 12.47,45.8 74.33,46.82 47.95,46.94 41.33,47.08 44.71,47.08 21.63,47.11 25.12,47.18 29.33,47.25 32.29,47.58 15.3,47.84 27.96,49.14 71.62,49.21 39.46,49.49 40.98,49.5 12.48,49.52 14,49.51 21.23,49.62 22.75,49.63 30.29,49.65 31.81,49.64 42.1,50.5 11.36,50.52 23.87,50.63 29.17,50.65 48.08,50.73 45.18,50.82 42.1,51.83 11.36,51.85 23.87,51.96 29.17,51.98 74.44,52.62 11.39,53.13 42.07,53.11 23.84,53.24 29.2,53.26 45.2,53.96 48.14,54.15 11.4,54.4 42.06,54.38 23.83,54.51 29.21,54.53 71.74,55.08 77.85,55.08 42.06,55.68 11.4,55.7 23.83,55.81 29.21,55.83
  other v2: 42.843,24.606 43.793,24.606 44.718,24.606 42.843,25.556 43.793,25.556 44.718,25.556 42.843,26.481 44.718,26.481 42.843,27.381 43.793,27.381
MUTE': JP2.2 U1.9 | length 14.3
  Top Layer w0.3: 41.5,23.556 U1.9
  Top Layer w0.5: JP2.2 30.484,22.439 30.484,21.876 31.37,20.99 34.36,20.99 36.02,22.65 40.594,22.65 41.5,23.556
NetC4_1: C4.1 C5.1 R0.1 | length 3.3
  Top Layer w0.6: R0.1 R0.1@47.879,34.845 ; C5.1@49.525,34.845 C5.1 C5.1@49.575,34.895 ; C4.1@49.575,36.395 C4.1@49.62,36.44
  Top Layer w0.8: R0.1@47.879,34.845 C5.1@49.525,34.845 ; C5.1@49.575,34.895 C4.1@49.575,36.395
NetC6_2: C6.2 U1.27 | length 4.6
  Top Layer w0.27: U1.27@43.048,28.675 C6.2@43.048,32.845
  Top Layer w0.29: U1.27 U1.27@43.048,28.411
  Top Layer w0.3: C6.2 C6.2@43.048,32.845
NetC8_2: C8.2 C12.1 R4.1 U1.24 | length 8.5
  Top Layer w0.25: R4.1@52.54,29.8 R4.1
  Top Layer w0.254: C8.2 C8.2@47.825,29.875 ; 49.643,29.825 49.648,29.82
  Top Layer w0.3: U1.24 44.543,29.083 45.335,29.875 C8.2@47.693,29.875
  Top Layer w0.6: C8.2@47.753,29.825 49.493,29.825 ; 49.498,29.82 49.648,29.82 C12.1@50.78,29.82 ; C12.1@50.78,29.78 C12.1@50.814,29.814 ; C12.1@50.894,29.784 R4.1@52.16,29.784
NetC11_2: C11.2 U1.28 | length 1.9
  Top Layer w0.3: C11.2@41.798,29.965 41.894,29.87 41.894,29.255 42.543,28.606 U1.28
NetC14_1: C14.1 SMA3.1 | length 32.7
  Top Layer w1: SMA3.1 17.528,51.404 17.528,50.505 ccw(c28.505,50.888) 20.095,43.823 cw(c19.251,43.117) 20.147,43.756 ccw(c29.625,50.518) 22.255,41.505 ; 22.255,41.505 C14.1
NetC16_1: C16.1 U1.16 U1.18 U1.19 U1.20 | length 9.3
  Top Layer w0.254: C16.1@47.346,26.946 C16.1@47.748,26.544
  Top Layer w0.3: U1.16 47.171,24.731 47.54,25.1 47.54,26.017 47.648,26.125 47.648,26.025 47.355,25.731 U1.18 ; U1.19 C16.1@47.648,26.231 ; U1.20 C16.1@47.344,26.731
NetC18_2: C18.2 U1.14 | length 3.6
  Top Layer w0.3: U1.14 45.043,23.497 C18.2@48.61,23.497
NetC20_1: C20.1 SMA4.1 | length 16.4
  Top Layer w0.293: SMA4.1 35.898,9.114 cw(c52.837,8.335) 37.456,15.472 cw(c48.768,9.714) C20.1@39.918,18.814
NetC20_2: C20.2 L1.2 U1.11 | length 3.2
  Top Layer w0.27: 42.883,21.64 ccw(c41.289,23.234) U1.11@43.543,23.21
  Top Layer w0.7: C20.2@41.075,19.951 41.11,19.949 41.204,19.942 42.026,20.764 L1.2@42.171,20.909
NetC21_1: C21.1 SMA5.1 | length 16.4
  Top Layer w0.293: C21.1 cw(c36.176,6.696) 50.975,14.22 cw(c49.994,13.722) 50.991,14.186 cw(c36.028,7.262) 52.495,8.087 52.495,3.528 SMA5.1
NetC21_2: C21.2 L2.1 U1.12 | length 3.7
  Top Layer w0.27: U1.12 44.031,23.341 44.031,23.338 ccw(c46.276,23.386) 44.691,21.795
  Top Layer w0.7: L2.1@45.433,20.909 46.641,19.701 C21.2
NetD1_A: D1.A R3.1 | length 2.6
  Top Layer w0.6: D1.A 22.81,30.675 25.315,30.675 R3.1
REF+: C6.1 JP1.2 | length 8.6
  Top Layer w0.9: C6.1 42.773,43.2 JP1.2
REF-EX: JP1.3 R1.2 SMA1.1 | length 13.1
  Top Layer w1.1: SMA1.1 35.66,47.153 35.703,47.11 35.763,47.11 39.373,43.5 39.938,43.5 40.188,43.25 JP1.3
REF-IN: JP1.1 JP4.1 R5.2 Y1.5 Y2.3 | length 27.9
  Top Layer w1.1: JP1.1 JP1.1@45.361,43.287 ; Y1.5@54.013,43.472 Y1.5
  Bottom Layer w0.8: Y1.5 56.47,43.51 56.49,43.53 Y2.3
  Bottom Layer w1.1: JP1.1 45.419,43.345 45.773,43.345 45.797,43.37 Y1.5@54.08,43.37 ; Y1.5 JP4.1
REFO: C14.2 U1.2 | length 4.4
  Top Layer w0.3: C14.2 38.942,27.231 U1.2
SCLK: J1.6 R8.2 U1.5 | length 35.2
  Top Layer w0.3: v1(27.78,28.27) 27.914,28.136 28.334,28.136 30.739,25.731 U1.5
  Bottom Layer w0.6: J1.6 8.515,27.121 9.146,27.121 9.175,27.15 15.45,27.15 R8.2@15.45,27.19 ; R8.2@15.45,27.23 20.21,27.23 21.25,28.27 v1(27.78,28.27)
SDI: J1.8 R7.2 U1.6 | length 35.3
  Top Layer w0.3: v1(27.84,26.54) 29.149,25.231 U1.6
  Bottom Layer w0.6: J1.8 8.594,24.39 9.024,23.96 20.46,23.96 23.04,26.54 v1(27.84,26.54)
SDO: J1.10 R6.2 U1.7 | length 35.9
  Top Layer w0.3: v1(27.873,24.9) 28.063,24.9 28.231,24.731 U1.7
  Bottom Layer w0.6: J1.10 9.576,20.598 15.55,20.598 20.678,20.598 24.98,24.9 v1(27.873,24.9)
STAT: J1.2 R3.2 U1.3 | length 42.5
  Top Layer w0.3: v1(31.84,28.38) 31.9,28.38 33.549,26.731 U1.3
  Top Layer w0.6: R3.2 29.57,30.65 v1(31.84,28.38)
  Bottom Layer w0.6: J1.2 8.594,32.01 9.354,32.77 27.9,32.77 31.84,28.83 v1(31.84,28.38)
pads on no net: Y1.1 Y2.1

## Polygon pours and split planes (outlines as drawn)
GND on Bottom Layer "GND_L04_P017" (solid, remove dead copper, pour order 17): -0.02,50.77 -0.02,-0.88 90.14,-0.88 90.14,57.51 0,57.51 0,50.777
3.3V on Top Layer "3.3V_L01_P011" (solid, pour order 11): 66.47,39.755 66.47,35.13 ccw(c67.04,35.13) 67.04,34.56 87.605,34.56 87.61,40.24 66.955,40.24 ccw(c66.955,39.755)
5V on Top Layer "5V_L01_P010" (solid, pour order 10): 66.68,26.84 66.68,22.03 ccw(c67.241,22.03) 67.241,21.469 87.414,21.46 87.479,27.45 67.29,27.45 ccw(c67.29,26.84)
GND on Top Layer "GND_L01_P025" (solid, remove dead copper, pour order 25): -0.02,50.77 -0.02,-0.88 90.14,-0.88 90.14,57.51 0,57.51 0,50.777
NetC20_2 on Top Layer "NETC20_2_L01_P012" (solid, remove dead copper, pour order 12): 42.054,21.26 ccw(c35.504,27.771) 43.446,23.058 43.545,22.938 43.571,22.783 ccw(c45.197,22.702) 43.571,22.62 43.535,22.364 ccw(c46.064,21.342) 43.446,22.11 ccw(c49.327,18.999) 43.296,21.808 ccw(c49.17,18.684) 43.146,21.508 42.984,21.246 42.55,20.812
3.3V on Top Layer "3.3V_L01_P022" (solid, pour order 22): 42.978,20.2 42.33,19.549 42.33,18.44 42.64,18.13 45.039,18.13 45.27,18.382 45.27,19.64 44.71,20.2
NetC21_2 on Top Layer "NETC21_2_L01_P021" (solid, remove dead copper, pour order 21): 45.619,21.207 cw(c52.148,27.841) 44.144,23.09 44.071,22.968 43.965,22.861 cw(c41.431,22.315) 44.008,22.599 44.071,22.351 cw(c40.626,20.925) 44.196,22.001 cw(c40.312,19.999) 44.299,21.786 cw(c39.566,18.362) 44.47,21.538 44.696,21.207 45.123,20.759
GND on GND_L2 "GND_L02_P019" (solid, remove dead copper, pour order 19): -0.02,50.77 -0.02,-0.88 90.14,-0.88 90.14,57.51 0,57.51 0,50.777
5V on PWR_L3 "5V_L03_P018" (solid, pour order 18): 46.393,24.86 64.98,24.86 64.98,21.45 83.44,21.45 83.44,30.23 79.83,30.23 79.83,32.52 46.393,32.52 46.393,30.23
3.3V on PWR_L3 "3.3V_L03_P020" (solid, remove dead copper, pour order 20): -0.02,50.77 -0.02,-0.88 90.14,-0.88 90.14,57.51 0,57.51 0,50.777

## Keep-outs
Keep-Out Layer:
  lines w0.254: -0.026,5.821 0.035,5.215 0.155,4.619 0.334,4.038 0.57,3.477 0.86,2.943 1.201,2.439 1.591,1.972 2.025,1.546 2.498,1.165 3.008,0.832 3.547,0.551 4.112,0.326 4.696,0.157 5.295,0.047 5.901,-0.004 6.205,0.001 7.248,0 84.007,0 84.311,0 84.917,0.061 85.513,0.182 86.094,0.361 86.655,0.597 87.189,0.886 87.693,1.228 88.16,1.617 88.586,2.051 88.968,2.525 89.3,3.034 89.581,3.574 89.806,4.139 89.975,4.723 90.085,5.321 90.136,5.927 90.131,6.231 90.153,48.8 90.149,51.375 90.148,51.679 90.087,52.284 89.967,52.88 89.788,53.462 89.552,54.023 89.263,54.558 88.921,55.061 88.532,55.529 88.098,55.955 87.624,56.337 87.115,56.669 86.575,56.95 86.01,57.176 85.426,57.345 84.828,57.455 84.221,57.506 83.917,57.501 6.123,57.5 5.819,57.499 5.214,57.438 4.618,57.318 4.037,57.139 3.476,56.903 2.941,56.613 2.438,56.272 1.971,55.882 1.545,55.449 1.163,54.975 0.831,54.465 0.55,53.926 0.324,53.361 0.156,52.777 0.005,51.957 -0.026,51.586 -0.026,7.253 -0.026,5.821

## Other copper
Top Layer:
  pour cut-out: 47.884,19.506 47.979,19.442 48.594,18.827 48.658,18.732 48.68,18.619 48.658,18.507 48.594,18.412 48.573,18.391 49.057,17.871 49.062,17.862 49.071,17.855 49.821,16.924 49.826,16.914 49.834,16.907 50.516,15.924 50.52,15.915 50.527,15.907 51.138,14.878 51.141,14.868 51.148,14.859 51.346,14.464 51.359,14.445 51.365,14.429 51.371,14.422 51.373,14.414 51.375,14.411 51.378,14.405 51.38,14.401 51.381,14.4 51.395,14.383 51.432,14.308 51.435,14.298 51.441,14.289 51.895,13.191 51.897,13.181 51.903,13.171 52.278,12.044 52.279,12.034 52.284,12.024 52.578,10.873 52.578,10.862 52.582,10.852 52.793,9.683 52.793,9.672 52.796,9.662 52.923,8.481 52.922,8.47 52.925,8.46 52.936,8.149 52.94,8.126 52.944,8.11 52.944,8.107 52.948,8.087 52.948,6.74 53.133,6.74 53.246,6.717 53.341,6.654 53.405,6.558 53.427,6.446 53.427,0.604 53.405,0.491 53.341,0.396 53.246,0.332 53.133,0.31 51.863,0.31 51.751,0.332 51.656,0.396 51.592,0.491 51.57,0.604 51.57,6.446 51.592,6.558 51.656,6.654 51.751,6.717 51.863,6.74 52.043,6.74 52.043,8.087 52.025,8.521 51.877,9.772 51.632,11.008 51.29,12.221 50.853,13.403 50.58,13.996 50.578,14.004 50.576,14.007 50.564,14.037 50.558,14.063 49.955,15.14 49.25,16.195 48.465,17.192 47.941,17.758 47.937,17.754 47.841,17.69 47.729,17.668 47.616,17.69 47.521,17.754 46.906,18.369 46.842,18.464 46.82,18.577 46.842,18.689 46.906,18.785 47.563,19.442 47.659,19.506 47.771,19.528
  pour cut-out: 40.13,19.706 40.225,19.643 40.883,18.985 40.946,18.89 40.969,18.777 40.946,18.665 40.883,18.569 40.268,17.954 40.172,17.89 40.06,17.868 39.947,17.89 39.852,17.954 39.782,18.024 39.383,17.589 38.732,16.741 38.158,15.84 37.858,15.265 37.838,15.239 37.816,15.195 37.365,14.106 36.992,12.987 36.701,11.845 36.491,10.685 36.365,9.513 36.351,9.113 36.351,6.665 36.533,6.665 36.646,6.642 36.741,6.579 36.805,6.483 36.827,6.371 36.827,0.529 36.805,0.416 36.741,0.321 36.646,0.257 36.533,0.235 35.263,0.235 35.151,0.257 35.056,0.321 34.992,0.416 34.97,0.529 34.97,6.371 34.992,6.483 35.056,6.579 35.151,6.642 35.263,6.665 35.446,6.665 35.446,9.114 35.449,9.132 35.449,9.134 35.453,9.152 35.457,9.169 35.459,9.18 35.473,9.566 35.475,9.576 35.474,9.587 35.605,10.802 35.608,10.812 35.608,10.822 35.825,12.025 35.829,12.035 35.829,12.045 36.131,13.229 36.136,13.239 36.137,13.249 36.523,14.408 36.528,14.418 36.531,14.428 36.998,15.557 37.004,15.565 37.007,15.576 37.053,15.669 37.069,15.689 37.072,15.697 37.085,15.716 37.088,15.721 37.377,16.276 37.385,16.286 37.39,16.298 37.992,17.244 38.001,17.253 38.007,17.265 38.69,18.154 38.699,18.163 38.706,18.174 39.158,18.667 39.13,18.707 39.108,18.82 39.13,18.932 39.194,19.028 39.809,19.643 39.905,19.706 40.017,19.729
  pour cut-out: 42.054,33.991 42.054,33.809 43.492,33.809 43.492,33.991
  pour cut-out: 36.774,28.382 36.903,28.253 37.92,29.27 37.791,29.399
  pour cut-out: 46.626,18.706 46.754,18.577 47.771,19.594 47.643,19.722
  pour cut-out: 40.146,19.923 40.017,19.794 41.034,18.777 41.163,18.906

## Silkscreen, mask and mechanical layers (free items; w line width, h text height)
Top Overlay:
  text "ANTENNA MEAS. SYS." at 1.28,42.43 h1
  text "3.3V" at 82.504,41.124 h1.52
  text "PLL BOARD" at 1.34,40.69 h1
  text "5V" at 82.634,28.234 h1.52
  text "GND" at 82.374,16.264 h1.52
  text "V2.2  05/2021" at 2.104,13.734 h1
  text "BY" at 2.084,12.214 h1
  text "EFE KIRAZ" at 2.064,10.604 h1
  text "FURKAN ASLAN HATIK" at 2.084,8.894 h1

## Text inside footprints (layer, text, board x,y; h text height)
SMA1: Mechanical 13 "PCB Edge" at 41.55,58.13 h1.27
SMA3: Mechanical 13 "PCB Edge" at 2.36,58.18 h1.27
SMA4: Mechanical 13 "PCB Edge" at 42.348,0.1 h1.27
SMA5: Mechanical 13 "PCB Edge" at 58.38,0.86 h1.27